# Altium PCB Fingerboardv2_forcommercial.PcbDoc
Units mil, origin at the board's own origin, x right, y up, seen from the top; angles counter-clockwise.
Board outline 628 x 1500 mil, 2 copper layers (Top Layer, Bottom Layer); 12 components, 14 nets, 70 pads, 13 vias.
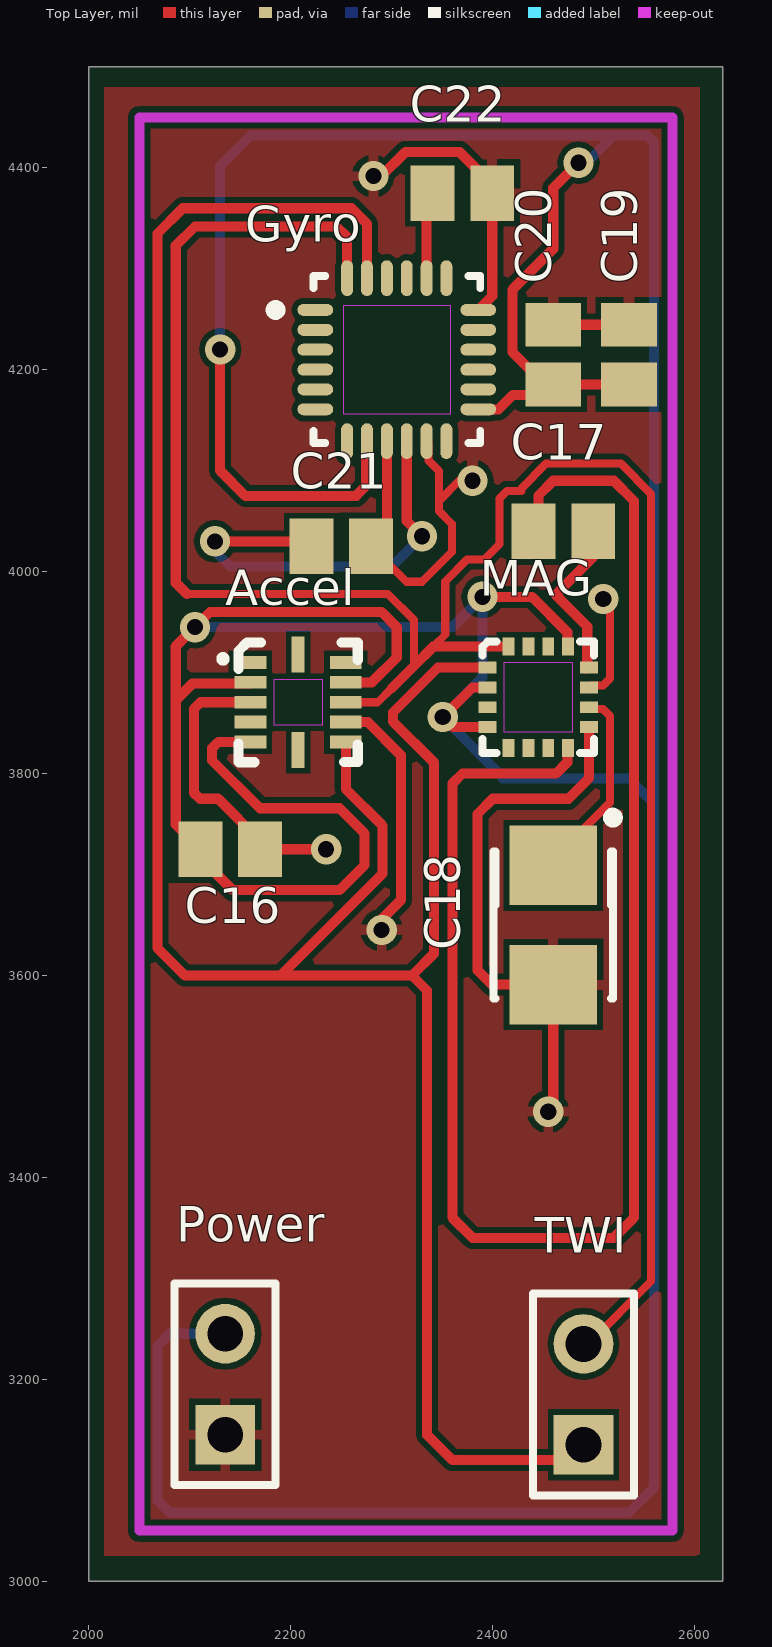
[diagram p0: Top Layer view]
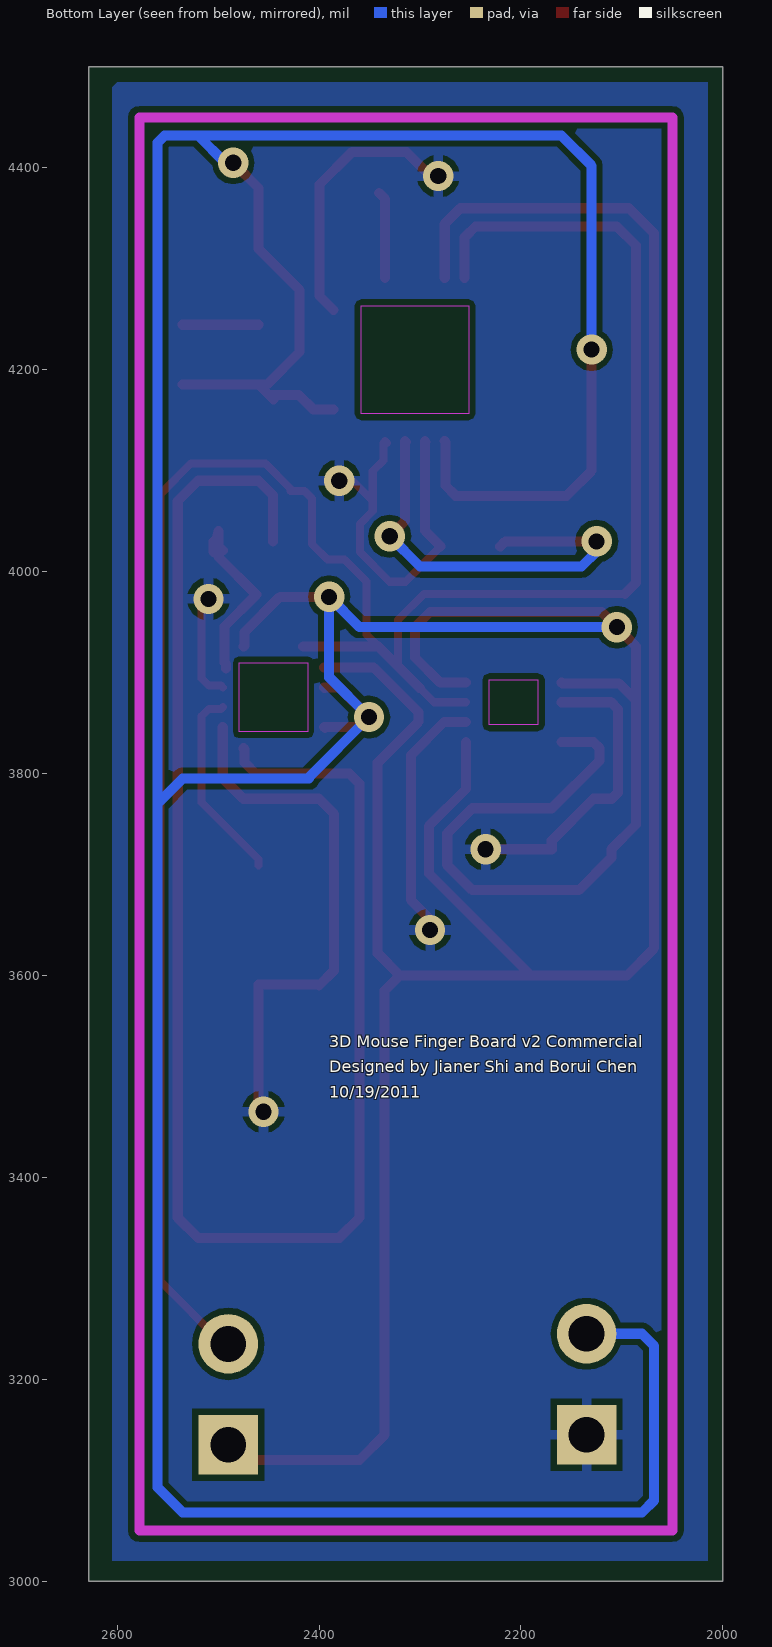
[diagram p1: Bottom Layer view, seen from below]

## Layer stack, top to bottom
Top Layer: signal copper 1.4
Dielectric: dielectric 12.6, FR-4, Dk 4.8
Bottom Layer: signal copper 1.4

## Board outline
2000,3000 2628,3000 2628,4500 2000,4500

## Design rules (kind name [scope] priority, off if disabled: settings)
Clearance [All] p1: gap=6
HoleSize [All] p1: absolutevalues=TRUE maxlimit=100 minlimit=13 maxpercent=80.000 minpercent=20.000
MinimumAnnularRing [All] p1: minimumring=7
PolygonConnect [All] p1: connectstyle=Relief reliefconductorwidth=10 reliefentries=4 polygonreliefangle="90 Angle"
RoutingVias [All] p1: holewidth=25 width=24 viastyle="Through Hole" minholewidth=13 minwidth=20 maxholewidth=16 maxwidth=35
SilkscreenOverComponentPads [All] p1: minsilkscreentomaskgap=10
SolderMaskExpansion [All] p1: expansion=4
Width [All] p1: maxlimit=10 minlimit=6 preferedwidth=6
26 further rules are at their usual default settings.

## Classes and differential pairs
component class Fingerboard: Power TWI
component class U_BMA180: Accel C16
component class U_HMC5883L: C17 C18 MAG
component class U_IMU3000: C19 C20 C21 C22 Gyro
net class AUX_TWI[1..0]: AUX_TWI0 AUX_TWI1
net class TWI[1..0]: TWI0 TWI1

## Components (designator, comment, footprint, x,y, rotation, side; value= is the part's Value field where it differs from the comment)
Accel "BMA180" BMA180 2160,3910 r0 top
C16 "Cap Semi" CAPC2012L 2140,3725 r180 top
C17 "Cap Semi" CAPC2012L 2470,4040 r0 top
C18 "Cap Pol1" TC3528-1411 2460,3650 r270 top
C19 "Cap Semi" CAPC2012L 2535,4215 r270 top
C20 "Cap Semi" CAPC2012L 2460,4215 r270 top
C21 "Cap Semi" CAPC2012L 2250,4025 r180 top
C22 "Cap Semi" CAPC2012L 2370,4375 r180 top
Gyro "IMU3000" IMU3000 2305,4210 r0 top
MAG "HMC5883L" HMC5883L 2395,3905 r0 top
Power "Header 2" HDR1X2 2135,3145 r90 top
TWI "TWI" HDR1X2 2490,3135 r90 top

## Footprints (in the part's own frame and the unit in brackets; to place one, negate y for a bottom-side part, rotate by r counter-clockwise, add the part's x,y. Pads: shape width x height; smd on the part's side, far side on the other; paste and mask are expansions set on the pad)
BMA180 [mm] "BMA180"
  rect 0.8x0.32 smd: 1(0,0) 2(0,-0.5) 3(0,-1) 4(0,-1.5) 5(0,-2) 7(2.4,-2) 8(2.4,-1.5) 9(2.4,-1) 10(2.4,-0.5) 11(2.4,0)
  rect 0.32x0.9 smd: 6(1.2,-2.2) 12(1.2,0.2)
  Keep-Out Layer region: 0.588,-1.563 1.817,-1.563 1.817,-0.434 0.588,-0.434
  silkscreen extent -0.73,-2.51 2.7,0.5, body extent -0.3,-2.5 2.7,0.5, height 0.9
CAPC2012L [mm] "Chip Capacitor, Body 2.0x1.3mm, IPC High Density"
  rect 1.1x1.4 smd: 1(-0.75,0) 2(0.75,0)
  body extent -1.1,-0.72 1.1,0.72, height 1.1
HDR1X2 [mm] "Connector; Header; 2 Position"
  rect 1.5x1.5 hole 0.9: 1(0,0)
  round 1.5 hole 0.9: 2(2.54,0)
  silkscreen extent -1.27,-1.27 3.81,1.27
HMC5883L [mm]
  rect 0.45x0.3 smd: 1(0,0) 2(0,-0.5) 3(0,-1) 4(0,-1.5) 9(2.55,-1.5) 10(2.55,-1) 11(2.55,-0.5) 12(2.55,0)
  rect 0.3x0.45 smd: 5(0.525,-2.025) 6(1.025,-2.025) 7(1.525,-2.025) 8(2.025,-2.025) 13(2.025,0.525) 14(1.525,0.525) 15(1.025,0.525) 16(0.525,0.525)
  Keep-Out Layer region: 0.41,-1.62 2.14,-1.62 2.14,0.12 0.41,0.12
  silkscreen extent -0.12,-2.15 2.67,0.65
IMU3000 [mm] "IMU3000"
  oval 0.9x0.3 smd: 1(-2.05,1.25) 2(-2.05,0.75) 3(-2.05,0.25) 4(-2.05,-0.25) 5(-2.05,-0.75) 6(-2.05,-1.25) 13(2.05,-1.25) 14(2.05,-0.75) 15(2.05,-0.25) 16(2.05,0.25) 17(2.05,0.75) 18(2.05,1.25)
  oval 0.3x0.9 smd: 7(-1.25,-2.05) 8(-0.75,-2.05) 9(-0.25,-2.05) 10(0.25,-2.05) 11(0.75,-2.05) 12(1.25,-2.05) 19(1.25,2.05) 20(0.75,2.05) 21(0.25,2.05) 22(-0.25,2.05) 23(-0.75,2.05) 24(-1.25,2.05)
  Keep-Out Layer region: -1.351,-1.359 1.353,-1.359 1.353,1.357 -1.351,1.357
  silkscreen extent -3.17,-2.1 2.1,2.1, body extent -2.07,-2.07 2.07,2.07, height 1
TC3528-1411 [mm] "Capacitor, SM Tantalum; Body 3.5 x 2.8 mm (LxW typ)"
  rect 2x2.2 smd: 1(-1.5,0) 2(1.5,0)
  silkscreen extent -2.82,-1.5 1.85,1.63

## Part data
C16 C17 C19 C20 C21 C22: "Capacitor (Semiconductor SIM Model)"
C18: "Polarized Capacitor (Radial)"
Power: "Header, 2-Pin"
TWI: library part "Header 2", "Header, 2-Pin"

## Via types
v1: diameter 30, hole 16, Top Layer to Bottom Layer, 13 vias

## Nets (pads, with @x,y where several pads share a name; then routed paths per layer and width w, separated by ;. In a path a pad name is that pad's centre, name@x,y a point inside that pad or via, vN(x,y) a via of type N, cw(c..) or ccw(c..) an arc to the next point about the centre after c; other vN are vias at no path point)
3.3VCC: Accel.2 Accel.5 Accel.10 C16.2 C19.2 C20.2 Gyro.8 Gyro.13 MAG.2 MAG.4 MAG.13 Power.2 | length 5477.2
  Top Layer w10: v1(2130,4220) 2130,4100 2155,4075 2265,4075 2265,4075.61 2274.69,4085.31 2274.69,4128.51 Gyro.8 ; Accel.5 2128.26,3831.26 2122,3825 2122,3813 2169.44,3765.56 2248.18,3765.56 2273,3740.74 2273,3709.26 2248.18,3684.44 2142.49,3684.44 2110.47,3716.46 C16.2 2086,3749.47 2086,3872.46 ; Accel.2 2159.02,3889.34 2102.88,3889.34 2086,3872.46 ; Accel.10 2280.32,3890.32 2305,3915 2305,3945 2290,3960 2120,3960 v1(2105,3945) 2086,3926 2086,3872.46 ; Gyro.13 2405.79,4160.79 2420,4175 C20.2@2449.53,4175 ; v1(2390,3975) 2438.86,3975 2473.95,3939.91 2473.95,3926.45 MAG.13 ; MAG.4@2394.05,3845 MAG.4 2360.49,3845.95 v1(2350.55,3855.89) 2379.97,3885.32 MAG.2 MAG.2@2394.68,3885 ; C20.2@2445,4170.47 C20.2@2449.53,4175 ; v1(2485,4405) 2460,4380 2460,4319.74 2419.44,4279.18 2419.44,4217.49 2451.46,4185.47 C20.2 ; C19.2 C20.2 ; C20.2@2449.53,4175 C20.2
  Bottom Layer w10: v1(2105,3945) 2360,3945 v1(2390,3975) 2390,3895.35 v1(2350.55,3855.89) 2410,3796.44 2410,3795 2535,3795 2560,3770 ; v1(2130,4220) 2130,4402 2160,4432 2520,4432 ; Power.2 2080,3245 2068,3233 2068,3080 2080,3068 2535,3068 2560,3093 2560,3770 ; v1(2485,4405) 2493,4405 2520,4432 ; 2520,4432 2553,4432 2560,4425 2560,3770
AUX_TWI0: Gyro.7
AUX_TWI1: Gyro.6
GND: Accel.3 Accel.8 C16.1 C18.2 C19.1 C20.1 C21.1 C22.1 Gyro.9 Gyro.11 Gyro.18 MAG.9 MAG.11 Power.1 | length 1926.4
  Top Layer w8: C21.1 2314.53,3990 2330.05,3990 2359.5,4019.45 2359.5,4047.22 2346.8,4059.92 2346.8,4070 ; Gyro.11@2332.75,4127.51 Gyro.11 2336.31,4127.51 2336.31,4110.06 2346.8,4099.58 2346.8,4070 ; v1(2380,4090) 2366.8,4090 2346.8,4070 ; MAG.11 2497.17,3887.09 2509.22,3887.09 2516.25,3894.12 2516.25,3966.2 v1(2509.5,3972.95)
  Top Layer w10: Accel.3 2110.63,3870.63 2104,3864 2104,3781 2110,3775 2128.07,3775 2169.53,3733.54 C16.1 v1(2235,3725) ; Accel.8 2276.3,3850.95 2309,3818.24 2309,3674.54 2290,3655.54 v1(2290,3645) v1@2291,3646 ; C21.1 2295.16,4040.63 Gyro.9 Gyro.9@2294.38,4128.51 ; v1(2281.87,4391.87) 2289.74,4391.87 2313.43,4415.56 2367.51,4415.56 2399.53,4383.54 C22.1 2399.53,4273.03 Gyro.18 ; v1(2455,3465) 2460,3470 C18.2 2400.94,3590.94 2400,3590 2385,3605 2385,3760 2400,3775 2475,3775 2495.39,3795.39 MAG.9 ; C20.1 C19.1
NetAccel_4: Accel.4
NetC17_1: C17.1 MAG.8 | length 1628.5
  Top Layer w10: C17.1@2445.47,4030 2445.47,4075.47 2460,4090 2520,4090 2540,4070 2540,3360 2520,3340 2380,3340 2360,3360 2360,3745 2360,3790 2370,3800 2462.91,3800 2473.95,3811.03 2473.95,3824.5 MAG.8 MAG.8@2475,3825
NetC17_2: C17.2 MAG.12 | length 209.3
  Top Layer w10: MAG.12@2492.25,3904.22 2492.25,3908.67 2493.63,3910.05 2493.63,3945.68 2462.16,3977.16 2499.53,4014.53 C17.2@2499.53,4025 ; C17.2@2495.39,4020.87 C17.2@2499.53,4025 ; C17.2@2499.53,4025 C17.2 2504.53,4019.53 2504.53,4030 C17.2@2499.53,4025
NetC18_1: C18.1 MAG.10 | length 195.6
  Top Layer w8: C18.1 2460,3715.1 2516.25,3771.35 2516.25,3856.82 2509.22,3863.85 2497.17,3863.85 MAG.10
NetC21_2: C21.2 Gyro.10 | length 435.1
  Top Layer w10: v1(2125,4030) 2215.47,4030 C21.2 ; v1(2330,4035) 2314.84,4050.16 Gyro.10 ; Gyro.10@2314.06,4128.51 Gyro.10 ; Gyro.10@2314.06,4128.51 Gyro.10 ; Gyro.10@2314.06,4128.51 Gyro.10
  Bottom Layer w10: v1(2125,4030) 2125,4020 2140,4005 2300,4005 v1(2330,4035)
NetC22_2: C22.2 Gyro.20 | length 86.8
  Top Layer w10: Gyro.20 2334.53,4369.06 C22.2
NetGyro_12: Gyro.12
NetINT_3: MAG.15
TWI0: Accel.7 Gyro.23 MAG.1 TWI.1 | length 2568.7
  Top Layer w10: Accel.7 2254.49,3784.71 2291,3748.2 2291,3701 2190,3600 ; Gyro.23 2275.47,4344.53 2260,4360 2093,4360 2068,4335 2068,3627 2095,3600 2190,3600 ; MAG.1 2345.91,3905 2301.35,3860.44 2301.35,3851.35 2342,3810.7 2342,3622 2320,3600 ; TWI.1 2475,3120 2360,3120 2335,3145 2335,3585 2320,3600 ; 2190,3600 2320,3600
TWI1: Accel.9 Gyro.24 MAG.16 TWI.2 | length 2272.5
  Top Layer w8: 2097,3978 2296.04,3978 2322,3952.04 2322,3906.54 ; Accel.9 2286.09,3870.63 2300.23,3884.77 ; 2341.13,3925.67 2353,3937.54 2353,3990.33 2374.67,4012 2391.63,4012 2406.82,4027.19 2406.82,4072.53 2414.29,4080 2428.47,4080 2428.47,4082.51 2452.96,4107 2527.04,4107 2557,4077.04 2557,3297 2495,3235 TWI.2
  Top Layer w10: 2097,3978 2086,3989 2086,4323 2105,4342 2245,4342 2255.79,4331.21 Gyro.24 ; 2300.23,3884.77 2322,3906.54 2341.13,3925.67 MAG.16
pads on no net: Accel.1 Accel.6 Accel.11 Accel.12 Gyro.1 Gyro.2 Gyro.3 Gyro.4 Gyro.5 Gyro.14 Gyro.15 Gyro.16 Gyro.17 Gyro.19 Gyro.21 Gyro.22 MAG.3 MAG.5 MAG.6 MAG.7 MAG.14

## Polygon pours and split planes (outlines as drawn)
GND on Bottom Layer "Bottom Layer-GND" (solid, pour order 4): 2015,4485 2600,4485 2605,4480 2605,3020 2015,3020
GND on Top Layer "Top Layer-GND" (solid, pour order 2): 2015,4480 2605,4480 2605,3020 2600,3025 2015,3025

## Keep-outs
Keep-Out Layer:
  lines w10: 2050,3050 2578,3050 2578,4450 2050,4450 2050,3050

## Silkscreen, mask and mechanical layers (free items; w line width, h text height)
Bottom Overlay:
  text "3D Mouse Finger Board v2 Commercial" at 2390,3525 h20
  text "Designed by Jianer Shi and Borui Chen" at 2390,3500 h20
  text "10/19/2011" at 2390,3475 h20

## Dimensions
2050,3050 to 2578,3050 on Mechanical 1
2050,3050 to 2050,4450 on Mechanical 1